# Altium PCB MS5837 for Cal V1.0.PcbDoc
Units mil, origin at the board's own origin, x right, y up, seen from the top; angles counter-clockwise.
Board outline 521.84 x 521.84 mil, 2 copper layers (Top Layer, Bottom Layer); 5 components, 4 nets, 14 pads, 2 vias.
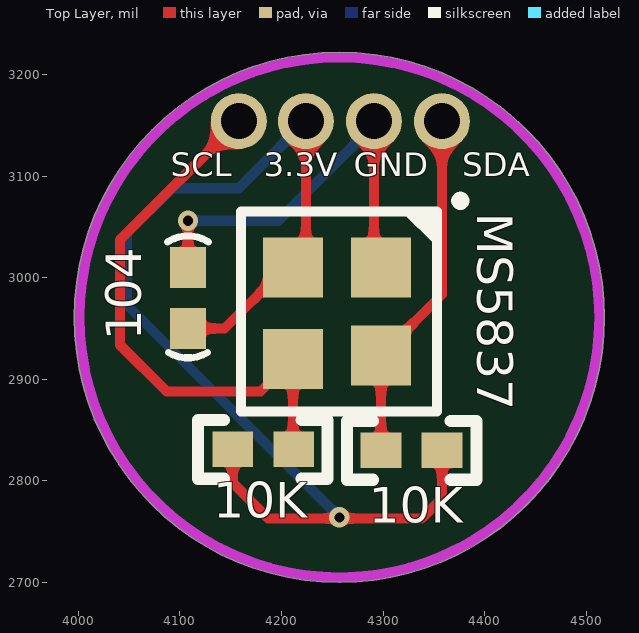
[diagram p0: Top Layer view]
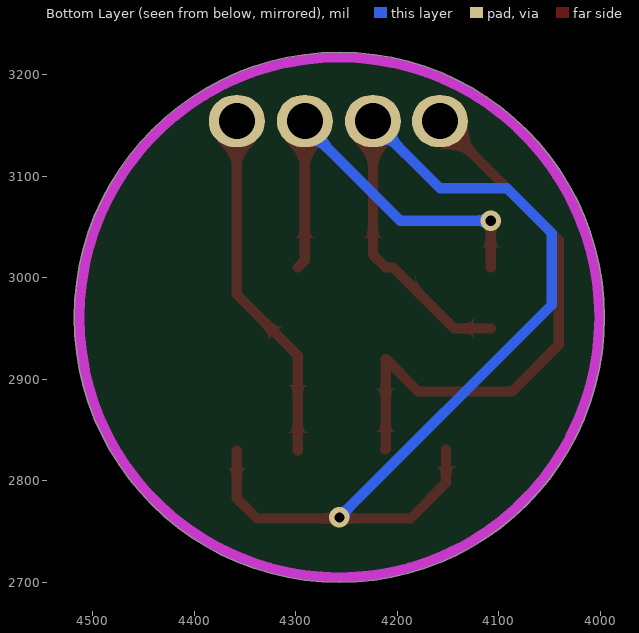
[diagram p1: Bottom Layer view, seen from below]
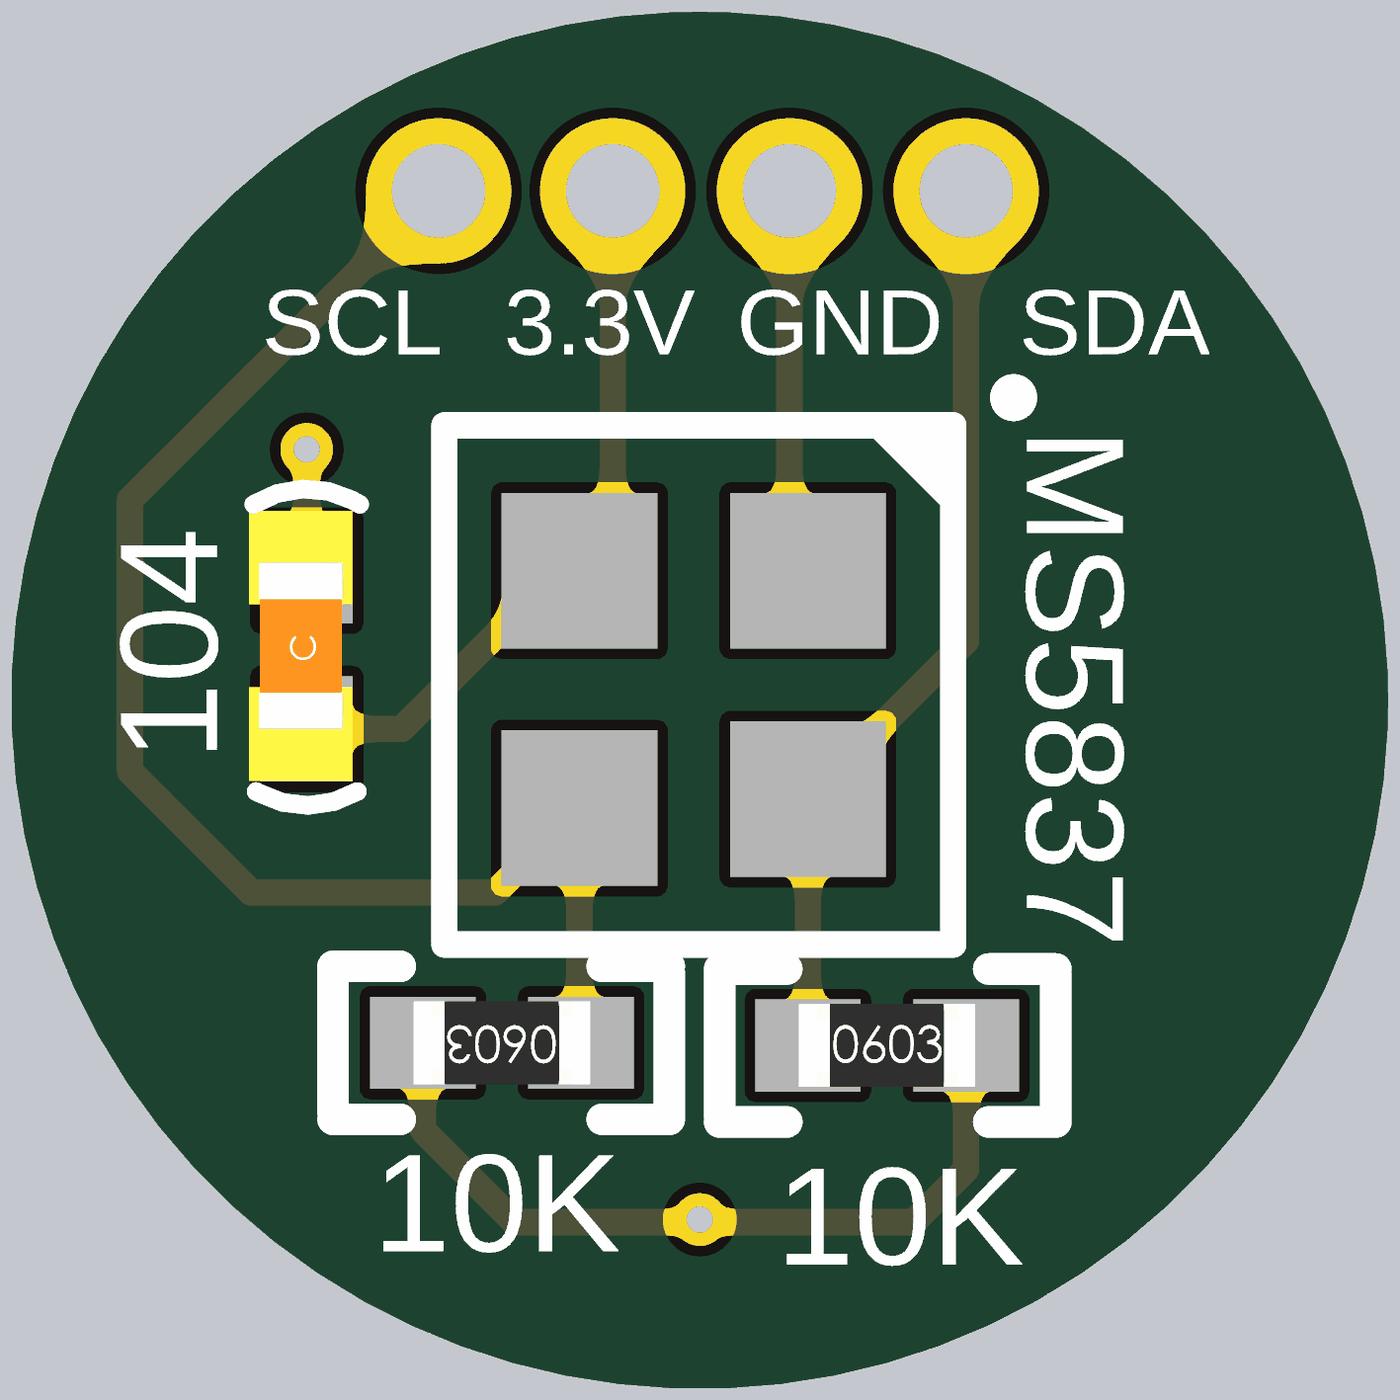
[diagram p2: 3D render of the assembled board from above, using the file's embedded part models]

## Layer stack, top to bottom
Top Solder: solder mask 0.4, Solder Resist, Dk 3.5
Top Layer: signal copper 1.4
Dielectric 1: dielectric 12.6, FR-4, Dk 4.8
Bottom Layer: signal copper 1.4
Bottom Solder: solder mask 0.4, Solder Resist, Dk 3.5

## Board outline
3996.08,2960.89 ccw(c4257,2960.89) 4257,2699.97 ccw(c4257,2960.89) 4517.92,2960.89 ccw(c4257,2960.89) 4257,3221.81 ccw(c4257,2960.89)

## Design rules (kind name [scope] priority, off if disabled: settings)
Clearance [All] p1: gap=8
PolygonConnect [All] p1: connectstyle=Relief reliefconductorwidth=10 reliefentries=4 polygonreliefangle="90 Angle" airgapwidth=10
RoutingVias [All] p1: holewidth=28 width=50 viastyle="Through Hole" minholewidth=28 minwidth=50 maxholewidth=28 maxwidth=50
SolderMaskExpansion [All] p1: expansion=4
Width [All] p1: maxlimit=30 minlimit=7 preferedwidth=10 minimp=50.000000 maximp=50.000000 favimp=50.000000
30 further rules are at their usual default settings.

## Components (designator, comment, footprint, x,y, rotation, side; value= is the part's Value field where it differs from the comment)
10K "4.2K" 0603R 4210,2830 r180 top (schematic designator R1)
10K "4.2K" 0603R 4300,2831 r0 top (schematic designator R2)
104 "100uF" 0603C 3826,3047 r90 top (schematic designator C1)
MS5837 "MS5837-02BA" MS5837-02BA 4255,2966 r0 top (schematic designator U2)
U1 "连接端子" 连接端子 4257.87,3111.03 r0 top

## Footprints (in the part's own frame and the unit in brackets; to place one, negate y for a bottom-side part, rotate by r counter-clockwise, add the part's x,y. Pads: shape width x height; smd on the part's side, far side on the other; paste and mask are expansions set on the pad)
0603C [mil]
  rect 40x35 smd: 1(-97,-282) 2(-37,-282)
  silkscreen extent -126,-302 -6,-262, body extent -117,-299 -14,-260, height 35
0603R [mil]
  rect 40x35 smd: 1(-2,-1) 2(58,-1)
  silkscreen extent -35,-30 92,28, body extent -5,-17 61,15, height 22
MS5837-02BA [mm]
  rect 1.5x1.5 smd: 1(1.092,1.118) 2(-1.108,1.118) 3(-1.108,-1.168) 4(1.092,-1.082)
  silkscreen extent -2.41,-2.48 3.17,2.88
连接端子 [mm]
  round 1.4 / inner oval 1.4x1.3 / far side oval 1.4x1.3 hole 0.9 mask+0.102: 1(-2.537,1.091) 2(-0.86,1.091) 3(0.842,1.091) 4(2.543,1.091)

## Part data
10K 10K: library part Res, "电阻"
104: library part Cap1, "无极贴片电容"

## Via types
v1: diameter 20, hole 10, Top Layer to Bottom Layer, 2 vias

## Nets (pads, with @x,y where several pads share a name; then routed paths per layer and width w, separated by ;. In a path a pad name is that pad's centre, name@x,y a point inside that pad or via, vN(x,y) a via of type N, cw(c..) or ccw(c..) an arc to the next point about the centre after c; other vN are vias at no path point)
+3.3V: 10K.2 104.1 MS5837.2 U1.2 | length 1174.4
  Top Layer w10: 104.1 4144,2950 4204,3010 MS5837.2 4224,3022.61 U1.2 ; 10K.2@4152,2831 4152,2798 4187,2763 4338,2763 4358,2783 10K.2@4358,2830
  Bottom Layer w10: U1.2 4158,3088 4092,3088 4048,3044 4048,2973 v1(4257,2764)
GND: 104.2 MS5837.1 U1.3 | length 428.7
  Top Layer w10: 104.2 v1(4108,3056) ; MS5837.1 4291,3017 U1.3 U1.3@4298,3147
  Bottom Layer w10: v1(4108,3056) 4197,3056 4291,3150 U1.3
SCL: 10K.1@4212,2831 MS5837.3 U1.1 | length 560.4
  Top Layer w10: U1.1 4041,3037 4041,2934 4087,2888 4179.39,2888 MS5837.3 4211.39,2831.61 10K.1@4212,2831
SDA: 10K.1@4298,2830 MS5837.4 U1.4 | length 348.9
  Top Layer w10: 10K.1@4298,2830 MS5837.4 4358,2983.39 U1.4

## Keep-outs
Keep-Out Layer:
  circle w10: c4257,2960.89 r255.91

## Silkscreen, mask and mechanical layers (free items; w line width, h text height)
Top Overlay:
  lines w10: 4326,3064 4351.06,3038.94 ; 4339,3063 4339,3058 ; 4353.12,3065.12 4346.12,3065.12 ; 4339,3058 4346.12,3065.12 ; 4339,3058 4348,3049 4348,3063.24 4346.12,3065.12
  text "SCL" at 4091,3092 h40
  text "3.3V" at 4182.75,3092 h40
  text "GND" at 4271,3092 h40
  text "SDA" at 4378,3092 h40